# Altium PCB PCB.PcbDoc
Units mm, origin at the board's own origin, x right, y up, seen from the top; angles counter-clockwise.
Board outline 50.79 x 55.31 mm, 2 copper layers (Top Layer, Bottom Layer); 67 components, 81 nets, 442 pads, 0 vias.
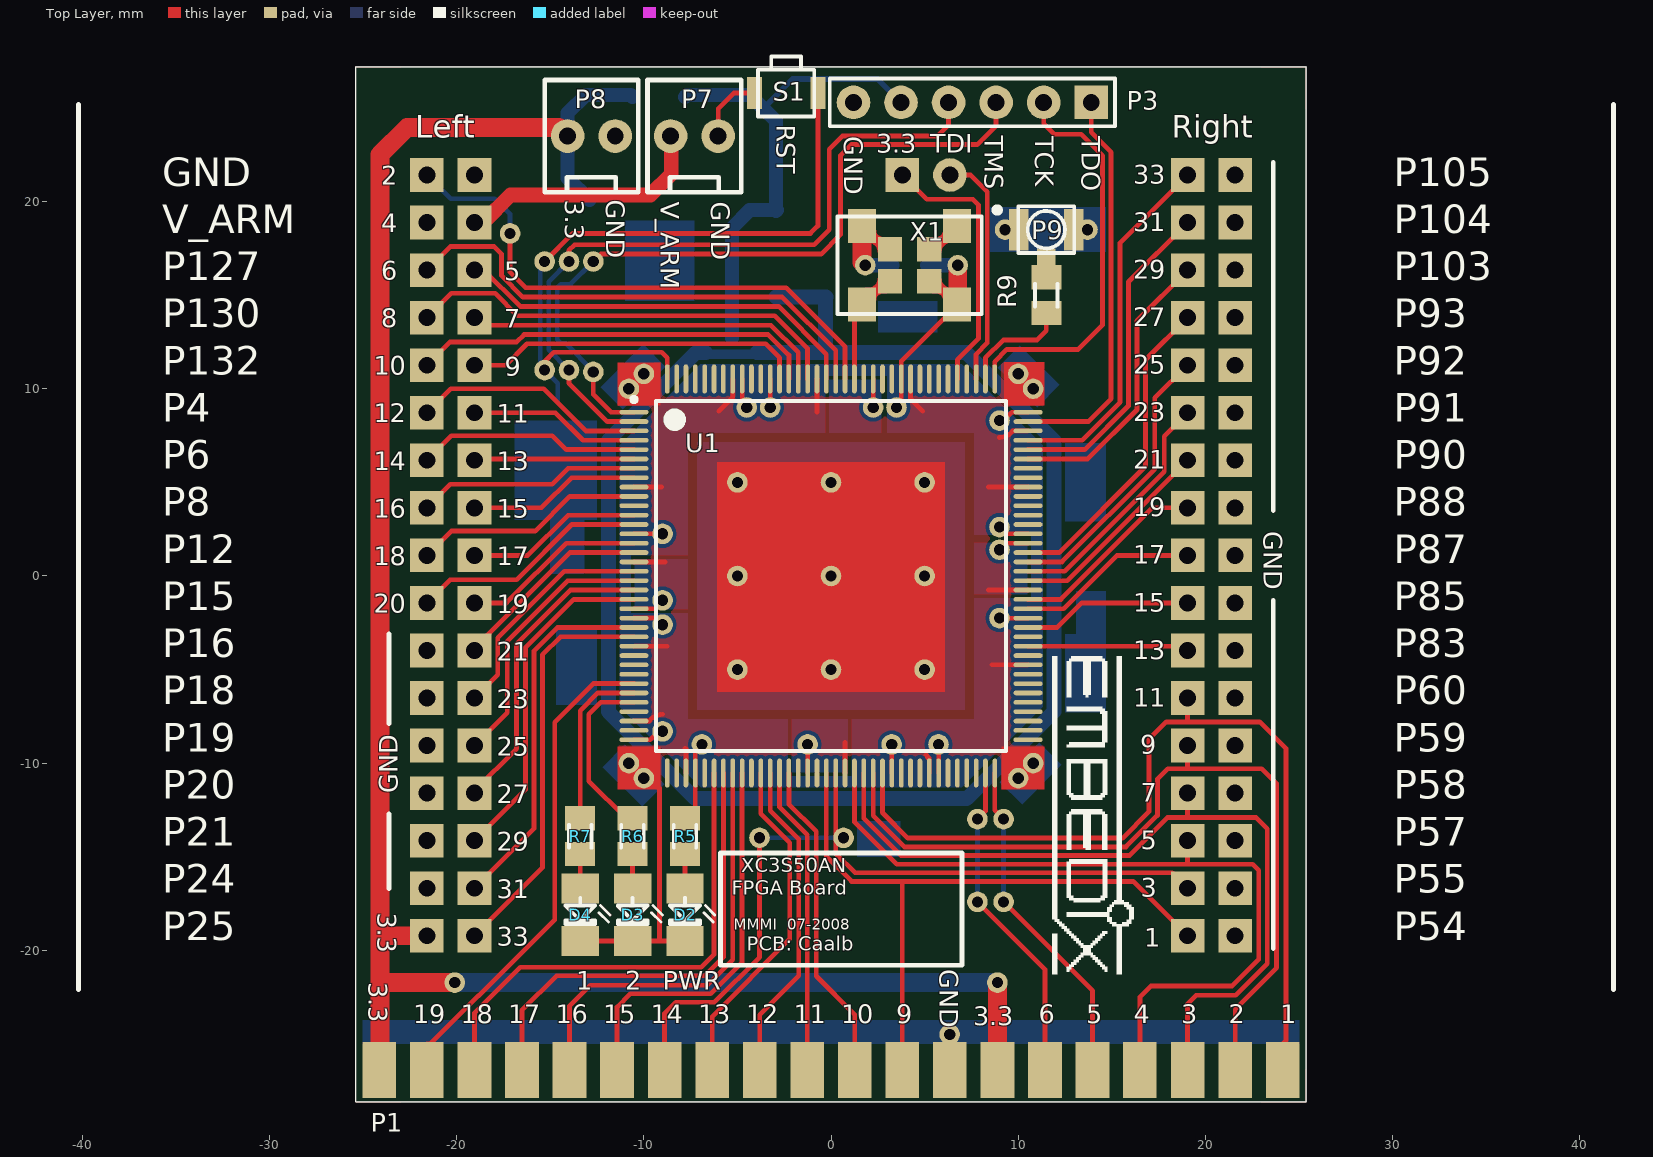
[diagram p0: Top Layer view]
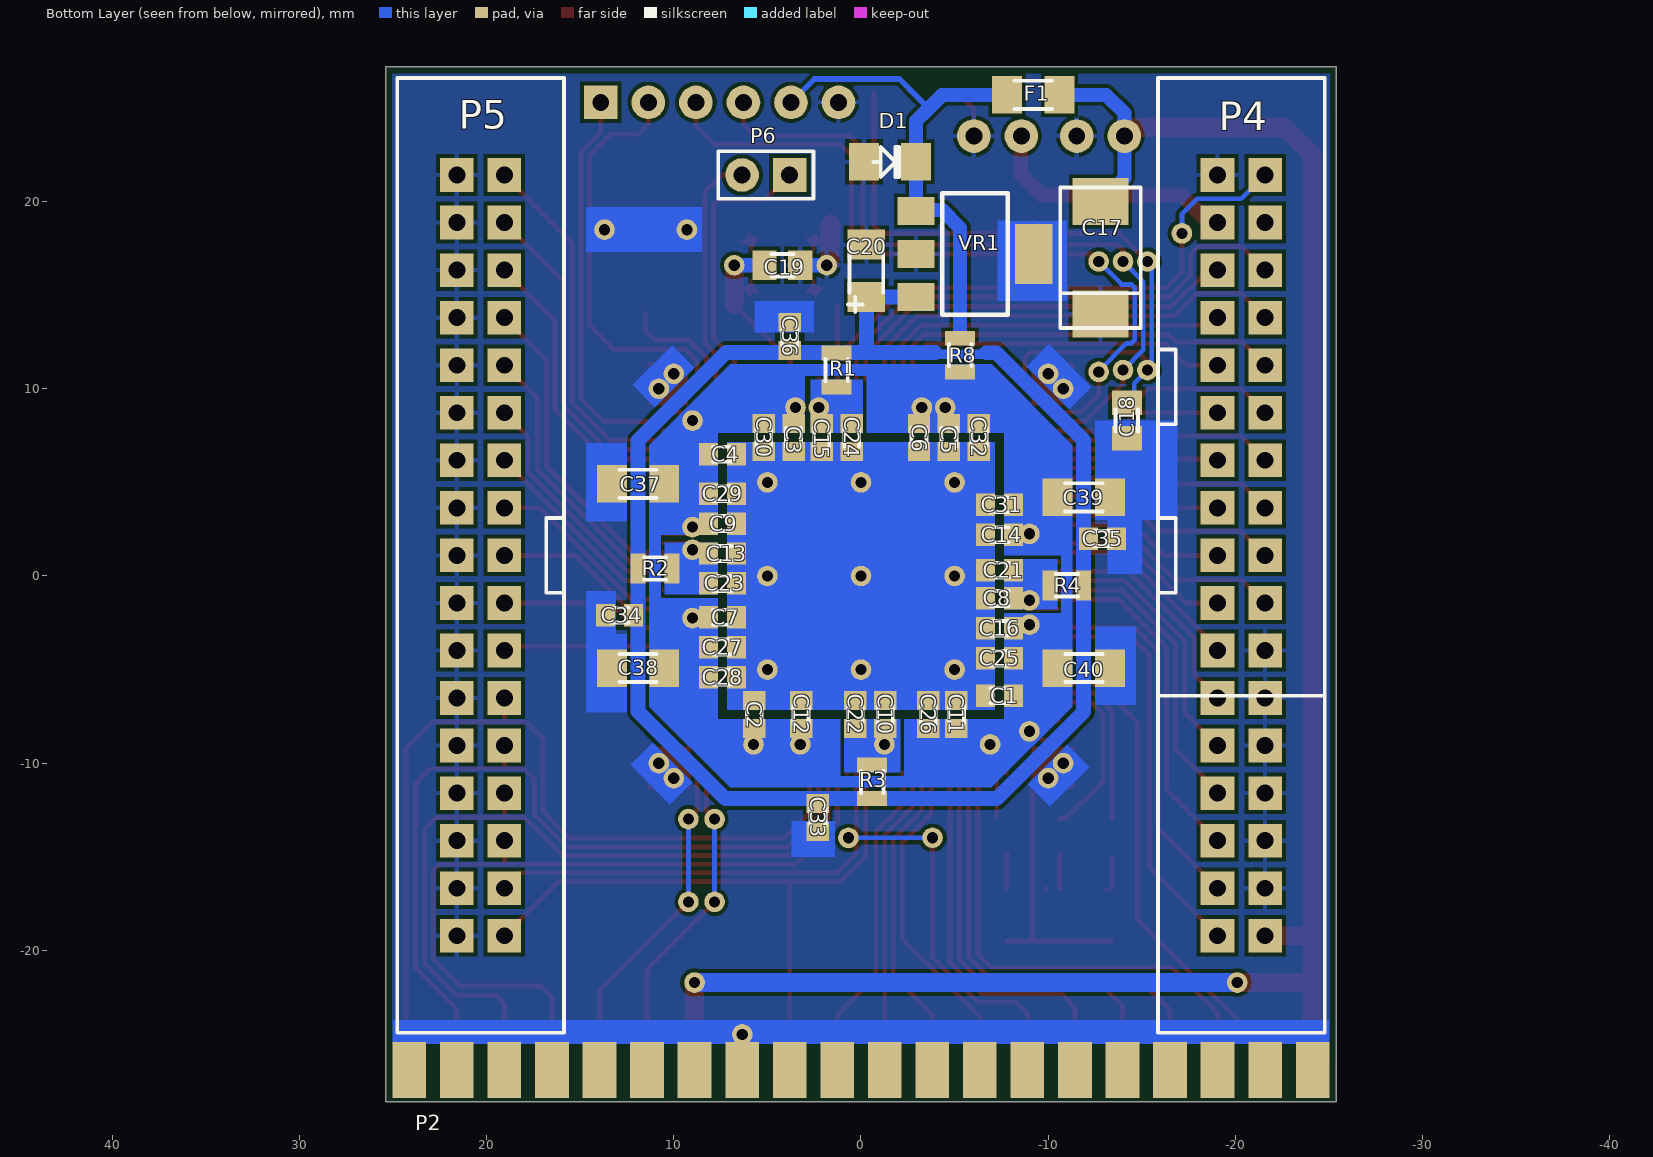
[diagram p1: Bottom Layer view, seen from below]

## Layer stack, top to bottom
Top Layer: signal copper 0.0356
Dielectric: dielectric 0.32, FR-4, Dk 4.8
Bottom Layer: signal copper 0.0356

## Board outline
25.39,-28.09 25.39,27.213 25.383,27.213 -25.4,27.213 -25.4,-28.1

## Design rules (kind name [scope] priority, off if disabled: settings)
Clearance [All] p1: gap=0.2
PolygonConnect [All] p1: connectstyle=Relief reliefconductorwidth=0.254 reliefentries=4 polygonreliefangle="90 Angle"
RoomDefinition "IO connections" [InComponentClass('IO connections')] p1: confinementstyle=ConfineIn formatcopy=TRUE lockcomponents=FALSE outline 26.55,-25.29 36.48,-25.29 36.48,-18.96 26.55,-18.96
RoomDefinition Power [InComponentClass('Power')] p2: confinementstyle=ConfineIn formatcopy=TRUE lockcomponents=FALSE outline 64.95,-60.15 82.65,-60.15 82.65,-54.7 64.95,-54.7
RoutingVias [All] p1: holewidth=0.711 width=1.27 viastyle="Through Hole" minholewidth=0.711 minwidth=1.27 maxholewidth=0.711 maxwidth=1.27
SolderMaskExpansion [All] p1: expansion=0.102
TestPointUsage [All] p1: valid=0 allowmultiple=FALSE
Testpoint [All] p1: side=15 testpointundercomponent=TRUE minsize=1.016 maxsize=2.54 preferedsize=1.524 minholesize=0 maxholesize=1.016 preferedholesize=0.813 testpointgrid=0.025 style=1023 order=0-112345678
Width [All] p1: maxlimit=1.8 minlimit=0.254 preferedwidth=0.254
19 further rules are at their usual default settings.

## Classes and differential pairs
component class Power: C1 C2 C3 C4 C5 C6 C7 C8 C9 C10 C11 C12 C13 C14 C15 C16 C17 C20 C21 C22 C23 C24 C25 C26 C27 C28 C29 C30 C31 C32 C33 C34 C35 C36 C37 C38 C39 C40 D1 F1 P7 P8 R1 R2 R3 R4 R8 VR1
component class "IO connections": C18 C19 D2 D3 D4 P1 P2 P3 P4 P5 P6 P9 R5 R6 R7 R9 S1 U1 X1

## Components (designator, comment, footprint, x,y, rotation, side; value= is the part's Value field where it differs from the comment)
C1 "Cap" 0603 -7.4,-6.4 r0 bottom locked
C2 "Cap" 0603 5.7,-7.4 r90 bottom locked
C3 "Cap" 0603 3.6,7.4 r90 bottom locked
C4 "Cap" 0603 7.4,6.5 r180 bottom locked
C5 "Cap" 0603 -4.7,7.4 r90 bottom locked
C6 "Cap" 0603 -3.1,7.4 r270 bottom locked
C7 "Cap" 0603 7.4,-2.2 r0 bottom locked
C8 "Cap" 0603 -7.4,-1.2 r0 bottom locked
C9 "Cap" 0603 7.4,2.8 r0 bottom locked
C10 "Cap" 0603 -1.3,-7.4 r90 bottom locked
C11 "Cap" 0603 -5.1,-7.4 r270 bottom
C12 "Cap" 0603 3.2,-7.4 r270 bottom locked
C13 "Cap" 0603 7.4,1.2 r180 bottom locked
C14 "Cap" 0603 -7.4,2.2 r180 bottom locked
C15 "Cap" 0603 2.1,7.4 r270 bottom locked
C16 "Cap" 0603 -7.4,-2.8 r180 bottom locked
C17 "Cap Pol1" "TANTAL 100UF 10V (LAGER)" -12.8,17 r270 bottom
C18 "Cap" 0805 -14.2,8.3 r90 bottom
C19 "Cap" 0805 4.2,16.6 r0 bottom
C20 "Cap Pol1" 1206POL -0.29,16.3 r90 bottom
C21 "Cap" 0603 -7.4,0.3 r0 bottom locked
C22 "Cap" 0603 0.3,-7.4 r90 bottom locked
C23 "Cap" 0603 7.4,-0.4 r180 bottom locked
C24 "Cap" 0603 0.5,7.4 r270 bottom locked
C25 "Cap" 0603 -7.4,-4.4 r180 bottom locked
C26 "Cap" 0603 -3.6,-7.4 r270 bottom
C27 "Cap" 0603 7.4,-3.8 r0 bottom locked
C28 "Cap" 0603 7.4,-5.4 r0 bottom locked
C29 "Cap" 0603 7.4,4.4 r0 bottom locked
C30 "Cap" 0603 5.2,7.4 r90 bottom locked
C31 "Cap" 0603 -7.4,3.8 r180 bottom locked
C32 "Cap" 0603 -6.3,7.4 r90 bottom locked
C33 "Cap" 0603 2.3,-12.9 r90 bottom
C34 "Cap" 0603 12.9,-2.1 r180 bottom
C35 "Cap" 0603 -12.9,2 r0 bottom
C36 "Cap" 0603 3.8,12.8 r270 bottom
C37 "Cap" 1206 11.91,4.92 r180 bottom
C38 "Cap" 1206 11.91,-4.92 r180 bottom
C39 "Cap" 1206 -11.9,4.2 r0 bottom
C40 "Cap" 1206 -11.91,-4.92 r0 bottom
D1 "3V6" D1206 -1.55,22.12 r180 bottom
D2 "POWER" LED1206 -7.8,-18.1 r270 top
D3 "LED2" LED1206 -10.6,-18.1 r270 top
D4 "LED1" LED1206 -13.4,-18.1 r270 top
F1 "315mA" 1206 -9.2,25.7 r0 bottom
P1 "Header 20" "HDR1X20 KANT SPECIAL" 0,-26.4 r180 top
P2 "Header 20" "HDR1X20 KANT" 0,-26.4 r0 bottom
P3 "Header 6" HDR1X6 13.9,25.3 r180 top
P4 "Header 17X2" "HDR2X10/17FLAD Combi" -19.05,21.42 r270 bottom
P5 "Header 17X2" "HDR2X17FLAD Special" 19.05,21.42 r90 bottom
P6 "Header 2" HDR1X2 3.81,21.42 r0 bottom
P7 "Header 2" "HDR2X1 M LÅS" -7.3,23.5 r180 top
P8 "Header 2" "HDR2X1 M LÅS" -12.8,23.5 r180 top
P9 "BNC" "MINIATURE COAXIAL CONNECTORS" 11.5,18.5 r180 top
R1 "Res2" J0805 1.3,11 r270 bottom locked
R2 "Res2" J0805 11,0.4 r180 bottom locked
R3 "Res2" J0805 -0.6,-11 r90 bottom locked
R4 "Res2" J0805 -11,-0.5 r0 bottom locked
R5 "Res2" 0805 -7.8,-13.9 r90 top
R6 "Res2" 0805 -10.6,-13.9 r90 top
R7 "Res2" 0805 -13.4,-13.9 r90 top
R8 "Res2" J0805 -5.3,11.8 r90 bottom
R9 "Res2" 0805 11.5,15 r90 top
S1 "RESET" B3U-3000P -2.4,25.8 r0 top
U1 "XC3S50AN-5TQ144C" TQ144_L 0,0 r0 top locked
VR1 "NCP566" SOT-223 -6.09,17.2 r270 bottom
X1 "CTX283LVCT el. CFPS-39" CB3LV-3C/CFPS-39 4.2,16.6 r180 top

## Footprints (in the part's own frame and the unit in brackets; to place one, negate y for a bottom-side part, rotate by r counter-clockwise, add the part's x,y. Pads: shape width x height; smd on the part's side, far side on the other; paste and mask are expansions set on the pad)
0603 [mm]
  rect 1x1.2 smd: 1(-0.75,0) 2(0.75,0)
  silkscreen extent -0.5,-0.4 0.5,0.4, body extent -0.75,-0.4 0.75,0.4, height 0.4
0805 [mm] "Resistor - MELF-R2012-0805"
  rect 1.3x1.6 smd: 1(-0.95,0) 2(0.95,0)
  silkscreen extent -0.6,-0.6 0.6,0.6, body extent -1,-0.6 1,0.6, height 0.5
1206 [mm] "Resistor - MELF-R3216-1206"
  rect 1.6x2 smd: 1(-1.4,0) 2(1.4,0)
  silkscreen extent -1,-0.75 1,0.75, body extent -1.5,-0.75 1.5,0.75, height 0.5
1206POL [mm]
  rect 1.6x2 smd: 1(-1.4,0) 2(1.4,0)
  silkscreen extent -2.2,-0.9 1.2,1, body extent -1.7,-0.9 1.7,0.9, height 1.85
B3U-3000P [mm] "Micro kant switch Farnell varenummer: 1333655"
  rect 0.8x1.7 smd: 1(-1.7,0) 2(1.7,0)
  silkscreen extent -1.5,-1.25 1.5,1.95, body extent -2,-1.25 2,1.95, height 1.2
CB3LV-3C/CFPS-39 [mm]
  rect 1.5x1.8 smd: 1(-2.54,-2.1) 2(2.54,-2.1) 3(2.54,2.1) 4(-2.54,2.1)
  rect 1.3x1.3 smd: 1(-1.05,-0.85) 2(1.05,-0.85) 3(1.05,0.85) 4(-1.05,0.85)
  silkscreen extent -4.81,-3.08 3.85,2.6, body extent -3.5,-2.5 3.5,2.5, height 1.4
D1206 [mm] "MELF-R3216-1206 modificeret med diode symbol"
  rect 1.6x2 smd: 1(-1.4,0) 2(1.4,0)
  silkscreen extent -0.9,-0.8 0.5,0.8, body extent -1.7,-0.8 1.8,0.8, height 1.6
HDR1X2 [mm]
  rect 1.8x1.8 hole 0.9: 1(0,0)
  round 1.8 hole 0.9: 2(2.54,0)
  silkscreen extent -1.27,-1.27 3.81,1.27, body extent -1.27,-1.27 3.81,1.27, height 9.5
HDR1X6 [mm]
  rect 1.8x1.8 hole 0.9: 1(0,0)
  round 1.8 hole 0.9: 2(2.54,0) 3(5.08,0) 4(7.62,0) 5(10.16,0) 6(12.7,0)
  silkscreen extent -1.27,-1.27 13.97,1.27, body extent -1.27,-1.27 13.97,1.27, height 9.5
"HDR1X20 KANT" [mm]
  rect 1.8x3 smd: 1(-24.13,0) 2(-21.59,0) 3(-19.05,0) 4(-16.51,0) 5(-13.97,0) 6(-11.43,0) 7(-8.89,0) 8(-6.35,0) 9(-3.81,0) 10(-1.27,0) 11(1.27,0) 12(3.81,0) 13(6.35,0) 14(8.89,0) 15(11.43,0) 16(13.97,0) 17(16.51,0) 18(19.05,0) 19(21.59,0) 20(24.13,0)
  body extent -25.4,-1 25.4,10.5, height 2.5
"HDR1X20 KANT SPECIAL" [mm]
  rect 1.8x3 smd: 1(-24.13,0) 2(-21.59,0) 3(-19.05,0) 4(-16.5,0) 5(-13.97,0) 6(-11.43,0) 7(-8.89,0) 8(-6.35,0) 9(-3.81,0) 10(-1.27,0) 11(1.27,0) 12(3.81,0) 13(6.35,0) 14(8.89,0) 15(11.43,0) 16(13.97,0) 17(16.51,0) 18(19.05,0) 19(21.59,0) 20(24.13,0)
  body extent -25.4,-1 25.4,10.5, height 2.5
"HDR2X1 M LÅS" [mm]
  round 1.8 hole 0.9: 1(1.27,0) 2(-1.27,0)
  silkscreen extent -2.5,-3 2.5,3, body extent -2.5,-3 2.5,3, height 11.5
"HDR2X10/17FLAD Combi" [mm]
  rect 1.8x1.8 hole 0.9: 1(0,0) 2(0,2.54) 3(2.54,0) 4(2.54,2.54) 5(5.08,0) 6(5.08,2.54) 7(7.62,0) 8(7.62,2.54) 9(10.16,0) 10(10.16,2.54) 11(12.7,0) 12(12.7,2.54) 13(15.24,0) 14(15.24,2.54) 15(17.78,0) 16(17.78,2.54) 17(20.32,0) 18(20.32,2.54) 19(22.86,0) 20(22.86,2.54) 21(25.4,0) 22(25.4,2.54) 23(27.94,0) 24(27.94,2.54) 25(30.48,0) 26(30.48,2.54) 27(33.02,0) 28(33.02,2.54) 29(35.56,0) 30(35.56,2.54) 31(38.1,0) 32(38.1,2.54) 33(40.64,0) 34(40.64,2.54)
  silkscreen extent -5.18,-3.18 45.82,5.72, body extent -5.28,-3.18 45.82,5.72, height 10
"HDR2X17FLAD Special" [mm]
  rect 1.8x1.8 hole 0.9: 1(-40.64,0) 2(-40.64,2.54) 3(-38.1,0) 4(-38.1,2.54) 5(-35.56,0) 6(-35.56,2.54) 7(-33.02,0) 8(-33.02,2.54) 9(-30.48,0) 10(-30.48,2.54) 11(-27.94,0) 12(-27.94,2.54) 13(-25.4,0) 14(-25.4,2.54) 15(-22.86,0) 16(-22.86,2.54) 17(-20.32,0) 18(-20.32,2.54) 19(-17.78,0) 20(-17.78,2.54) 21(-15.24,0) 22(-15.24,2.54) 23(-12.7,0) 24(-12.7,2.54) 25(-10.16,0) 26(-10.16,2.54) 27(-7.62,0) 28(-7.62,2.54) 29(-5.08,0) 30(-5.08,2.54) 31(-2.54,0) 32(-2.54,2.54) 33(0,0) 34(0,2.54)
  silkscreen extent -45.82,-3.18 5.18,5.72, body extent -45.92,-3.18 5.18,5.72, height 10
J0805 [mm] "0805 med mere plads mellem pads"
  rect 0.8x1.6 smd: 1(-0.9,0) 2(0.9,0)
  silkscreen extent -0.6,-0.6 0.6,0.6, body extent -1,-0.6 1,0.6, height 0.5
LED1206 [mm] "MELF-R3216-1206 modificeret med diode symbol"
  rect 1.6x2 smd: 1(-1.4,0) 2(1.4,0)
  silkscreen extent -0.9,-0.8 0.5,1.59, body extent -1.6,-0.8 1.6,0.8, height 1.1
"MINIATURE COAXIAL CONNECTORS" [mm] "Meets up to 6 GHz Requirement"
  rect 1x1 smd: 1(0,1.5)
  rect 1.05x2.2 smd: 2(-1.475,0) 2(1.475,0)
  silkscreen extent -1.5,-1.25 1.5,1.25, body extent -1.5,-1.25 1.5,1.25, height 1.3
SOT-223 [mm]
  rect 1.5x2 smd: 1(-2.3,-3.15) 2(0,-3.15) 3(2.3,-3.15)
  rect 3.2x2 smd: 2(0,3.15)
  silkscreen extent -3.25,-1.75 3.25,1.75, body extent -3.25,-3.55 3.25,3.6, height 1.7
"TANTAL 100UF 10V (LAGER)" [mm]
  rect 2.5x3 smd: 1(-3,0) 2(3,0)
  silkscreen extent -3.75,-2.15 3.75,2.15, body extent -3.75,-2.15 3.75,2.15, height 3
TQ144_L [mm] "Thin QFP, 144-Leads, Body 20x20mm, Pitch 0.5mm, IPC High Density"
  oval 1.55x0.25 smd: 1(-10.525,8.75) 2(-10.525,8.25) 3(-10.525,7.75) 4(-10.525,7.25) 5(-10.525,6.75) 6(-10.525,6.25) 7(-10.525,5.75) 8(-10.525,5.25) 9(-10.525,4.75) 10(-10.525,4.25) 11(-10.525,3.75) 12(-10.525,3.25) 13(-10.525,2.75) 14(-10.525,2.25) 15(-10.525,1.75) 16(-10.525,1.25) 17(-10.525,0.75) 18(-10.525,0.25) 19(-10.525,-0.25) 20(-10.525,-0.75) 21(-10.525,-1.25) 22(-10.525,-1.75) 23(-10.525,-2.25) 24(-10.525,-2.75) 25(-10.525,-3.25) 26(-10.525,-3.75) 27(-10.525,-4.25) 28(-10.525,-4.75) 29(-10.525,-5.25) 30(-10.525,-5.75) 31(-10.525,-6.25) 32(-10.525,-6.75) 33(-10.525,-7.25) 34(-10.525,-7.75) 35(-10.525,-8.25) 36(-10.525,-8.75) 73(10.525,-8.75) 74(10.525,-8.25) 75(10.525,-7.75) 76(10.525,-7.25) 77(10.525,-6.75) 78(10.525,-6.25) 79(10.525,-5.75) 80(10.525,-5.25) 81(10.525,-4.75) 82(10.525,-4.25) 83(10.525,-3.75) 84(10.525,-3.25) 85(10.525,-2.75) 86(10.525,-2.25) 87(10.525,-1.75) 88(10.525,-1.25) 89(10.525,-0.75) 90(10.525,-0.25) 91(10.525,0.25) 92(10.525,0.75) 93(10.525,1.25) 94(10.525,1.75) 95(10.525,2.25) 96(10.525,2.75) 97(10.525,3.25) 98(10.525,3.75) 99(10.525,4.25) 100(10.525,4.75) 101(10.525,5.25) 102(10.525,5.75) 103(10.525,6.25) 104(10.525,6.75) 105(10.525,7.25) 106(10.525,7.75) 107(10.525,8.25) 108(10.525,8.75)
  oval 0.25x1.55 smd: 37(-8.75,-10.525) 38(-8.25,-10.525) 39(-7.75,-10.525) 40(-7.25,-10.525) 41(-6.75,-10.525) 42(-6.25,-10.525) 43(-5.75,-10.525) 44(-5.25,-10.525) 45(-4.75,-10.525) 46(-4.25,-10.525) 47(-3.75,-10.525) 48(-3.25,-10.525) 49(-2.75,-10.525) 50(-2.25,-10.525) 51(-1.75,-10.525) 52(-1.25,-10.525) 53(-0.75,-10.525) 54(-0.25,-10.525) 55(0.25,-10.525) 56(0.75,-10.525) 57(1.25,-10.525) 58(1.75,-10.525) 59(2.25,-10.525) 60(2.75,-10.525) 61(3.25,-10.525) 62(3.75,-10.525) 63(4.25,-10.525) 64(4.75,-10.525) 65(5.25,-10.525) 66(5.75,-10.525) 67(6.25,-10.525) 68(6.75,-10.525) 69(7.25,-10.525) 70(7.75,-10.525) 71(8.25,-10.525) 72(8.75,-10.525) 109(8.75,10.525) 110(8.25,10.525) 111(7.75,10.525) 112(7.25,10.525) 113(6.75,10.525) 114(6.25,10.525) 115(5.75,10.525) 116(5.25,10.525) 117(4.75,10.525) 118(4.25,10.525) 119(3.75,10.525) 120(3.25,10.525) 121(2.75,10.525) 122(2.25,10.525) 123(1.75,10.525) 124(1.25,10.525) 125(0.75,10.525) 126(0.25,10.525) 127(-0.25,10.525) 128(-0.75,10.525) 129(-1.25,10.525) 130(-1.75,10.525) 131(-2.25,10.525) 132(-2.75,10.525) 133(-3.25,10.525) 134(-3.75,10.525) 135(-4.25,10.525) 136(-4.75,10.525) 137(-5.25,10.525) 138(-5.75,10.525) 139(-6.25,10.525) 140(-6.75,10.525) 141(-7.25,10.525) 142(-7.75,10.525) 143(-8.25,10.525) 144(-8.75,10.525)
  silkscreen extent -10.65,-9.35 9.35,9.55, body extent -10,-10 10,10, height 1.6

## Part data
C1 C2 C3 C4 C5 C6 C7 C8 C9 C10 C11 C12 C13 C14 C15 C16 C18 C19 C21 C22 C23 C24 C25 C26 C27 C28 C29 C30 C31 C32 C33 C34 C35 C36 C37 C38 C39 C40: "Capacitor"
C17 C20: "Polarized Capacitor (Radial)"
D1: library part "Diode 1N5407", "Small signal diode"
D2 D3 D4: library part LED0, "Typical INFRARED GaAs LED"
F1: library part "Fuse 2", "Fuse"
P1 P2: "Header, 20-Pin"
P3: "Header, 6-Pin"
P4 P5: "Header, 17-Pin, Dual row"
P6: library part "Header 2X2", "Header, 2-Pin, Dual row"
P7 P8: "Header, 2-Pin"
P9: "BNC Elbow Connector"
R1 R2 R3 R4 R5 R6 R7 R8 R9: "Resistor"
S1: library part SW-PB, "Switch"
U1: "Spartan-3AN Non-Volatile FPGA, 108 User I/Os, 144-Pin TQFP, High Performance, Commercial Grade"
VR1: library part "Volt Reg", "Voltage Regulator"
X1: library part CFPS-39, "3.3V, ultra minature surface mount oscillator"

## Free pads (board coordinates)
  round 1.1 hole 0.6: 0(-20.1,-21.72) 0(-17.146,18.3) 0(-15.3,11) 0(-15.3,16.8) 0(-14,11) 0(-14,16.8) 0(-12.7,10.9) 0(-12.7,16.8) 0(-10.8,-10) 0(-10.8,10) 0(-10,-10.8) 0(-10,10.8) 0(-9,-8.3) 0(-9,-2.6) 0(-9,-1.3) 0(-9,2.25) 0(-6.9,-9) 0(-5,-5) 0(-5,0) 0(-5,5) 0(-4.5,9) 0(-3.82,-13.987) 0(-3.25,9) 0(-1.25,-9) 0(0,-5) 0(0,0) 0(0,5) 0(0.67,-13.99) 0(1.827,16.605) 0(2.25,9) 0(3.24,-9) 0(3.5,9) 0(5,-5) 0(5,0) 0(5,5) 0(5.74,-9) 0(6.34,-24.49) 0(6.77,16.6) 0(7.82,-17.41) 0(7.82,-12.99) 0(8.89,-21.72) 0(9,-2.25) 0(9,1.4) 0(9,2.61) 0(9,8.3) 0(9.22,-17.41) 0(9.22,-12.99) 0(9.3,18.5) 0(10,-10.8) 0(10,10.8) 0(10.8,-10) 0(10.8,10) 0(13.7,18.5)

## Nets (pads, with @x,y where several pads share a name; then routed paths per layer and width w, separated by ;. In a path a pad name is that pad's centre, name@x,y a point inside that pad or via, vN(x,y) a via of type N, cw(c..) or ccw(c..) an arc to the next point about the centre after c; other vN are vias at no path point)
1.2V: C20.1 C33.2 C34.2 C35.2 C36.2 R1.1 R2.1 R3.1 R4.1 VR1.3 | length 87
  Bottom Layer w0.8: -6.7,11.925 -7.225,11.925 -11.9,7.25 -11.9,-7.25 -7.25,-11.9 7.25,-11.9 11.9,-7.25 11.9,7.25 7.2,11.95 -3.95,11.95 ; VR1.3@-2.93,14.9 C20.1@-0.28,14.9 ; -0.29,12.14 C20.1
3.3V: C1.1 C2.1 C3.2 C4.1 C5.2 C6.1 C7.2 C9.2 C11.2 C12.2 C14.2 C16.2 C19.2 C25.2 C26.2 C27.2 C28.2 C29.2 C30.2 C31.2 C32.2 C37.2 C38.2 C39.2 C40.2 pad.0@3.5,9 pad.0@3.24,-9 pad.0@5.74,-9 pad.0@6.77,16.6 pad.0@9,2.61 pad.0@9,8.3 pad.0@9,-2.25 pad.0@-3.25,9 pad.0@-4.5,9 pad.0@-6.9,-9 pad.0@-9,2.25 pad.0@-9,-2.6 pad.0@-9,-8.3 R5.2 R8.1 U1.14 U1.23 U1.36 U1.40 U1.61 U1.66 U1.86 U1.95 U1.108 U1.119 U1.133 U1.136 X1.4 | length 30.1
  Top Layer w0.25: U1.36 -9.65,-8.75 pad.0@-9.3,-8.4 ; U1.14 pad.0@-9,2.25 ; U1.40 -7.25,-9.35 pad.0@-6.9,-9 ; U1.136 -4.75,9.25 pad.0@-4.5,9 ; pad.0@-3.25,9 U1.133 ; U1.61 pad.0@3.25,-9.01 ; pad.0@3.75,9 U1.119 ; U1.66 pad.0@5.75,-9.01 ; pad.0@9,-2.25 U1.86 ; pad.0@9,2.61 9.36,2.25 U1.95 ; pad.0@9.2,8.3 9.65,8.75 U1.108
  Top Layer w0.254: U1.23 -9.35,-2.25 pad.0@-9,-2.6 ; R5.2@-7.25,-12.85 U1.40 ; U1.119 3.75,11.48 X1.4@6.77,14.5 ; pad.0@9,8.3 pad.0@9.2,8.3
  Top Layer w1: X1.4@6.77,14.5 pad.0@6.77,16.6
  Bottom Layer w0.8: C19.2 pad.0@6.77,16.6
GND: C1.2 C2.2 C3.1 C4.2 C5.1 C6.2 C7.1 C8.2 C9.1 C10.2 C11.1 C12.1 C13.2 C14.1 C15.2 C16.1 C17.2 C18.1 C19.1 C20.2 C21.2 C22.2 C23.2 C24.2 C25.1 C26.1 C27.1 C28.1 C29.1 C30.1 C31.1 C32.1 C33.1 C34.1 C35.1 C36.1 C37.1 C38.1 C39.1 C40.1 D1.1 D2.2 D3.2 D4.2 P1.8 P2.1 P2.2 P2.3 P2.4 P2.5 P2.6 P2.7 P2.8 P2.9 P2.10 P2.11 P2.12 P2.13 P2.14 P2.15 P2.16 P2.17 P2.18 P2.19 P2.20 P3.6 P4.1 P4.22 P4.24 P4.26 P4.28 P4.30 P4.32 P5.2 P5.4 P5.6 P5.8 P5.10 P5.12 P5.14 P5.16 P5.18 P5.20 P5.22 P5.24 P5.26 P5.28 P5.30 P5.32 P5.34 P7.2 P8.2 P9.2 pad.0@0,0 pad.0@0,5 pad.0@0,-5 pad.0@1.827,16.605 pad.0@5,0 pad.0@5,5 pad.0@5,-5 pad.0@6.34,-24.49 pad.0@9.3,18.5 pad.0@10,10.8 pad.0@10,-10.8 pad.0@10.8,10 pad.0@10.8,-10 pad.0@13.7,18.5 pad.0@-5,0 pad.0@-5,5 pad.0@-5,-5 pad.0@-10,10.8 pad.0@-10,-10.8 pad.0@-10.8,10 pad.0@-10.8,-10 S1.1 U1.9 U1.17 U1.26 U1.34 U1.39 U1.56 U1.65 U1.81 U1.89 U1.100 U1.106 U1.118 U1.128 U1.137 VR1.2 X1.2 | length 45.6
  Top Layer w0.25: U1.34 -9.712,-7.75 ; U1.26 -8.75,-3.75 ; U1.17 -8.85,0.75 ; U1.9 -9.05,4.75 ; -9.712,-7.741 cw(c-9,-8.3) -9,-7.394 ; U1.39 -7.75,-9.25 ; -0.75,8.75 U1.128 ; U1.56 0.75,-8.9 ; 4.25,9.455 U1.118 ; 8.4,-0.75 U1.89 ; 8.4,4.75 U1.100 ; 8.6,-4.75 U1.81 ; 9,7.4 ccw(c9,8.306) 9.712,7.746 ; 9.7,7.75 U1.106
  Top Layer w0.254: D4.2 D2.2 ; -9.17,-19.5 -9.17,-11.342 ; -7.8,-9.2 -7.75,-9.25 ; P7.2 -6.03,24.97 -5.2,25.8 S1.1 ; -6,8.8 -5.25,9.55 U1.137 ; 4.25,9.455 4.9,8.805 ; 5.08,-9.566 ccw(c5.087,-9.558) 5.087,-9.569 5.118,-9.569 ; 5.133,-9.633 5.143,-9.643 cw(c5.078,-9.708) 5.17,-9.708 ccw(c5.217,-9.662) 5.217,-9.727 5.25,-9.727 U1.65
  Top Layer w1: X1.2@1.6,18.5 X1.2@1.6,18.8 ; X1.2@1.66,18.7 1.66,16.767 pad.0@1.827,16.6
  Bottom Layer w0.8: pad.0@1.827,16.6 C19.1
"IN 3.3V": C17.1 F1.1 P1.7 P1.20 P4.34 P8.1 pad.0@8.89,-21.72 pad.0@-20.1,-21.72 | length 106.3
  Top Layer w0.254: P1.20@-24.1,-24.97 -24.1,-24.9
  Top Layer w1: P1.20@-24.1,-24.97 -24.1,22.5 -22.64,23.96 -14.53,23.96 P8.1 ; -24.1,-21.73 -24.09,-21.72 pad.0@-20.1,-21.72 ; -24.1,-19 -23.88,-19.22 P4.34 ; P1.7@8.89,-25 pad.0@8.89,-21.72
  Bottom Layer w0.75: C17.1@-12.9,20.1 -14.07,21.27 P8.1 -14.07,24.73 -13.1,25.7 -10.7,25.7 F1.1@-10.6,25.6
  Bottom Layer w1: pad.0@-20.1,-21.72 pad.0@8.89,-21.72
M0: U1.38
M1: U1.37
NetC8_1: C8.1 C21.1 pad.0@-9,-1.3 R4.2 U1.22 | length 1.7
  Top Layer w0.25: U1.22 -9.35,-1.75 pad.0@-9,-1.4
NetC10_1: C10.1 C22.1 pad.0@-1.25,-9 R3.2 U1.52 | length 1.5
  Top Layer w0.25: U1.52 pad.0@-1.25,-9
NetC13_1: C13.1 C23.1 pad.0@9,1.4 R2.2 U1.94 | length 1.7
  Top Layer w0.254: pad.0@9,1.4 9.35,1.75 U1.94
NetC15_1: C15.1 C24.1 pad.0@2.25,9 R1.2 U1.122 | length 1.5
  Top Layer w0.25: pad.0@2.25,9 U1.122
NetC18_2: C18.2 pad.0@-15.3,11 pad.0@-15.3,16.8 S1.2 U1.144 | length 38.9
  Top Layer w0.254: pad.0@-15.3,11 -15.3,11.458 -14.812,11.946 -9.046,11.946 -8.75,11.65 U1.144 ; pad.0@-15.3,16.8 -13.8,18.3 -1.1,18.3 -0.7,18.7 S1.2
  Bottom Layer w0.254: pad.0@-15.3,16.8 -15.535,16.565 -15.535,11.235 -15.3,11 -14.6,10.3 C18.2@-14.6,9.35
NetD2_1: D2.1 R5.1 | length 1.9
  Top Layer w0.254: D2.1 R5.1
NetD3_1: D3.1 R6.1 | length 1.9
  Top Layer w0.254: D3.1 R6.1 ; D3.1@-9.9,-16.7 D3.1@-9.838,-16.762
NetD4_1: D4.1 R7.1 | length 1.7
  Top Layer w0.254: D4.1 R7.1@-13.4,-15
NetP9_1: P9.1 R9.2
P3: P4.12 U1.3 | length 12.5
  Top Layer w0.254: P4.12 -20.31,10 -15.358,10 -13.108,7.75 U1.3
P4: P4.11 U1.4 | length 9.1
  Top Layer w0.254: P4.11 -14.72,8.72 -13.25,7.25 U1.4
P5: P4.14 U1.5 | length 11.9
  Top Layer w0.254: P4.14 -20.28,7.49 -14.89,7.49 -14.15,6.75 U1.5
P6: P4.13 U1.6 | length 8.5
  Top Layer w0.254: P4.13@-19.05,6.25 U1.6
P7: P4.16 U1.7 | length 11.9
  Top Layer w0.254: P4.16 -20.33,4.9 -14.9,4.9 -14.05,5.75 U1.7
P8: P4.15 U1.8 | length 9.2
  Top Layer w0.254: P4.15 -15.473,3.64 -13.863,5.25 U1.8
P10: P4.18 U1.10 | length 12.4
  Top Layer w0.254: P4.18 -20.29,2.4 -15.8,2.4 -13.95,4.25 U1.10
P12: P4.17 U1.12 | length 9.4
  Top Layer w0.254: P4.17 -16.2,1.1 -14.05,3.25 U1.12
P13: P4.20 U1.13 | length 12.8
  Top Layer w0.254: P4.20 -20.35,-0.2 -16.8,-0.2 -13.85,2.75 U1.13
P15: P4.19 U1.15 | length 9.8
  Top Layer w0.254: P4.19 -17.34,-1.44 -14.15,1.75 U1.15
P16: P4.21 U1.16 | length 10.8
  Top Layer w0.254: P4.21 -19.05,-3.85 -13.95,1.25 U1.16
P18: P4.23 U1.18 | length 12.9
  Top Layer w0.254: P4.23@-18.6,-6.52 P4.23 -17.8,-5.27 -17.8,-3.3 -14.25,0.25 U1.18
P19: P4.25 U1.19 | length 14.4
  Top Layer w0.254: P4.25 -17.3,-7.31 -17.3,-3.475 -14.075,-0.25 U1.19
P20: P4.27 U1.20 | length 16.2
  Top Layer w0.254: P4.27@-19.05,-11.468 -16.8,-9.218 -16.8,-3.628 -13.922,-0.75 U1.20
P21: P4.29 U1.21 | length 18.3
  Top Layer w0.254: P4.29 -16.324,-11.414 -16.324,-3.824 -13.75,-1.25 U1.21
P24: P4.31 U1.24 | length 19.9
  Top Layer w0.254: P4.31 -15.87,-13.5 -15.87,-4.012 -14.608,-2.75 U1.24
P25: P4.33 U1.25 | length 21.8
  Top Layer w0.254: P4.33 -15.416,-15.586 -15.416,-4.216 -14.45,-3.25 U1.25
P30: P1.19 U1.30 | length 25.2
  Top Layer w0.254: P1.19@-21.59,-25 -21.4,-25 -18.81,-22.41 -18.799,-22.41 -14.763,-18.373 -14.763,-7.822 -12.69,-5.75 U1.30
P31: R7.2 U1.31 | length 9
  Top Layer w0.254: R7.2 -13.4,-7.2 -12.45,-6.25 U1.31
P32: R6.2 U1.32 | length 9.4
  Top Layer w0.254: R6.2 -10.95,-12.95 -12.946,-10.954 -12.946,-7.388 -12.308,-6.75 U1.32
P42: P1.18 U1.42 | length 25.4
  Top Layer w0.254: P1.18@-19.05,-25 -19.05,-23.35 -16.6,-20.9 -6.932,-20.9 -6.25,-20.218 U1.42
P43: P1.17 U1.43 | length 23.6
  Top Layer w0.254: P1.17@-16.51,-25 -16.51,-23.21 -14.66,-21.36 -6.75,-21.36 -5.75,-20.36 U1.43
P44: P1.16 U1.44 | length 21.7
  Top Layer w0.254: P1.16@-13.97,-25 -13.97,-22.97 -12.86,-21.86 -6.608,-21.86 -5.25,-20.502 U1.44
P45: P1.15 U1.45 | length 19.8
  Top Layer w0.254: P1.15@-11.43,-25 -11.43,-23.03 -10.715,-22.315 -6.421,-22.315 -4.75,-20.644 U1.45
P46: U1.46
P47: P1.13 U1.47 | length 16.8
  Top Layer w0.254: P1.13@-6.35,-25 -6.35,-23.54 -2.2,-19.39 -2.2,-14.25 -3.75,-12.7 U1.47
P48: P1.12 U1.48 | length 15.8
  Top Layer w0.254: -3.81,-24.87 -3.81,-23.44 -1.724,-21.354 -1.724,-14.056 -3.25,-12.53 U1.48
P49: P1.11 U1.49 | length 15.1
  Top Layer w0.254: U1.49 -2.75,-12.35 -1.27,-13.83 P1.11@-1.27,-25
P50: P1.10 U1.50 | length 15.9
  Top Layer w0.254: U1.50 -2.25,-12.19 -0.79,-13.65 -0.79,-21.37 1.27,-23.43 P1.10@1.27,-25
P51: U1.51
P54: P1.9 P5.1 U1.54 | length 34.2
  Top Layer w0.254: U1.54 -0.25,-14.97 1.1,-16.32 16.15,-16.32 P5.1 ; P1.9@3.81,-25 3.81,-16.35
P55: P1.14 P5.3 pad.0@0.67,-13.99 pad.0@-3.82,-13.987 U1.55 | length 42.7
  Top Layer w0.254: P1.14@-8.89,-25 -8.89,-23.37 -8.29,-22.77 -6.229,-22.77 -3.82,-20.361 pad.0@-3.82,-13.987 ; U1.55 0.25,-14.828 1.282,-15.86 18.23,-15.86 P5.3
  Bottom Layer w0.254: pad.0@-3.82,-13.987 pad.0@0.67,-13.99
P57: P1.4 P5.5 U1.57 | length 40.8
  Top Layer w0.254: U1.57 1.25,-13.14 3.51,-15.4 22.53,-15.4 22.845,-15.715 22.845,-20.485 21.43,-21.9 17.1,-21.9 16.51,-22.49 P1.4@16.51,-25 ; 19.05,-15.25 P5.5
P58: P1.3 P5.7 U1.58 | length 41.6
  Top Layer w0.254: U1.58 1.75,-12.953 3.727,-14.93 15.95,-14.93 17.98,-12.9 22.7,-12.9 23.3,-13.5 23.3,-20.709 21.609,-22.4 19.5,-22.4 19.05,-22.85 P1.3@19.05,-25 ; 19.05,-12.85 P5.7
P59: P1.2 P5.9 U1.59 | length 43.8
  Top Layer w0.254: U1.59 2.25,-12.803 3.922,-14.475 15.755,-14.475 17.44,-12.79 17.44,-10.85 17.99,-10.3 23.01,-10.3 23.8,-11.09 23.8,-20.93 21.59,-23.14 P1.2@21.59,-25 ; 19.05,-10.3 P5.9
P60: P1.1 P5.11 U1.60 | length 46.7
  Top Layer w0.254: U1.60 2.75,-12.64 4.11,-14 15.588,-14 16.986,-12.602 16.986,-8.724 17.91,-7.8 22.9,-7.8 24.3,-9.2 24.3,-24.83 P1.1@24.13,-25 ; 19.05,-7.7 P5.11
P71: P1.6 pad.0@7.82,-12.99 pad.0@7.82,-17.41 U1.71 | length 16.1
  Top Layer w0.254: pad.0@7.82,-17.41 11.43,-21.02 P1.6@11.43,-25 ; pad.0@7.82,-12.99 8.25,-12.56 U1.71
  Bottom Layer w0.254: pad.0@7.82,-17.41 pad.0@7.82,-12.99
P72: P1.5 pad.0@9.22,-12.99 pad.0@9.22,-17.41 U1.72 | length 16.6
  Top Layer w0.254: U1.72 8.75,-12.52 pad.0@9.22,-12.99 ; pad.0@9.22,-17.41 13.97,-22.16 P1.5@13.97,-25
  Bottom Layer w0.254: pad.0@9.22,-17.41 pad.0@9.22,-12.99
P83: P5.13 U1.83 | length 8.6
  Top Layer w0.254: U1.83 18.82,-3.75 P5.13
P85: P5.15 U1.85 | length 9.1
  Top Layer w0.254: U1.85 12.08,-2.75 13.39,-1.44 P5.15
P87: P5.17 U1.87 | length 9.7
  Top Layer w0.254: U1.87 12.43,-1.75 15.28,1.1 P5.17
P88: P5.19 U1.88 | length 10.6
  Top Layer w0.254: U1.88 12.28,-1.25 17.17,3.64 P5.19
P90: P5.21 U1.90 | length 11.2
  Top Layer w0.254: U1.90 12.62,-0.25 P5.21
P91: P5.23 U1.91 | length 13.1
  Top Layer w0.254: U1.91 12.478,0.25 17.8,5.572 17.8,7.47 P5.23
P92: P5.25 U1.92 | length 15.1
  Top Layer w0.254: U1.92 12.336,0.75 17.3,5.714 17.3,9.51 P5.25
P93: P5.27 U1.93 | length 17.1
  Top Layer w0.254: U1.93 12.194,1.25 16.8,5.856 16.8,11.55 P5.27
P103: P5.29 U1.103 | length 15.5
  Top Layer w0.254: U1.103 13.709,6.25 16.346,8.887 16.346,13.636 P5.29
P104: P5.31 U1.104 | length 17.4
  Top Layer w0.254: U1.104 13.555,6.75 15.892,9.087 15.892,15.722 P5.31
P105: P5.33 U1.105 | length 19.4
  Top Layer w0.254: U1.105 13.413,7.25 15.438,9.275 15.438,17.808 P5.33
P110: R9.1 U1.110 | length 5.9
  Top Layer w0.254: U1.110 8.25,11.65 9.2,12.6 11,12.6 11.5,13.1 R9.1
P111: P6.2 U1.111 | length 12.6
  Top Layer w0.254: P6.2 7.459,21.42 8.35,20.529 8.35,12.45 7.75,11.85 U1.111
P113: P6.1 U1.113 | length 14.5
  Top Layer w0.254: P6.1 5.11,20.12 7.58,20.12 7.875,19.825 7.875,12.675 6.75,11.55 U1.113
P124: U1.124 X1.3 | length 3.9
  Top Layer w0.254: U1.124 X1.3@1.25,14.4
P125: P4.2 pad.0@-17.146,18.3 U1.125 | length 29.7
  Top Layer w0.254: pad.0@-17.146,18.3 -17.146,16.228 -16.318,15.4 -2.4,15.4 0.75,12.25 U1.125
  Bottom Layer w0.254: P4.2 -20.32,20.15 -17.96,20.15 -17.146,19.336 pad.0@-17.146,18.3
P126: P4.6 U1.126 | length 26.9
  Top Layer w0.254: P4.6 -20.33,17.6 -18,17.6 -17.6,17.2 -17.6,16.04 -16.46,14.9 -2.6,14.9 0.25,12.05 U1.126
P127: P4.5 U1.127 | length 21.8
  Top Layer w0.254: P4.5@-18.898,16.34 -18.548,16.34 -16.608,14.4 -2.8,14.4 -0.25,11.85 U1.127
P129: P4.8 U1.129 | length 23.7
  Top Layer w0.254: P4.8 -20.29,15.1 -17.95,15.1 -16.75,13.9 -3,13.9 -1.25,12.15 U1.129
P130: P4.7 U1.130 | length 19.2
  Top Layer w0.254: P4.7@-18.9,13.4 -3.208,13.4 -1.758,11.95 -1.75,11.95 U1.130
P131: P4.10 U1.131 | length 21.7
  Top Layer w0.254: P4.10 -20.35,12.5 -16.8,12.5 -16.4,12.9 -3.35,12.9 -2.25,11.8 U1.131
P132: P4.9 U1.132 | length 18.2
  Top Layer w0.254: P4.9 -17.382,11.26 -16.242,12.4 -3.5,12.4 -2.75,11.65 U1.132
TCK: P3.2 U1.109 | length 21.5
  Top Layer w0.254: U1.109 8.75,11.45 9.4,12.1 13.2,12.1 14.509,13.409 14.509,22.449 13.358,23.6 11.93,23.6 11.36,24.17 P3.2
TDI: P3.4 pad.0@-14,11 pad.0@-14,16.8 U1.2 | length 39.1
  Top Layer w0.254: pad.0@-14,11 -14,10.3 -11.95,8.25 U1.2 ; pad.0@-14,16.8 -14,17.4 -13.7,17.7 -0.9,17.7 -0.1,18.5 -0.1,22.8 0.6,23.5 5.67,23.5 6.28,24.11 P3.4
  Bottom Layer w0.254: pad.0@-14,11 -15.081,12.081 -15.081,15.719 pad.0@-14,16.8
TDO: P3.1 U1.107 | length 21.2
  Top Layer w0.254: U1.107 13.75,8.25 14.963,9.463 14.963,22.637 13.9,23.7 P3.1
TMS: P3.3 pad.0@-12.7,10.9 pad.0@-12.7,16.8 U1.1 | length 40
  Top Layer w0.254: pad.0@-12.7,10.9 -12.7,9.7 -11.75,8.75 U1.1 ; pad.0@-12.7,16.8 -12.3,17.2 -0.525,17.2 0.5,18.225 0.5,22.458 1.088,23.046 7.816,23.046 8.82,24.05 P3.3
  Bottom Layer w0.254: pad.0@-12.7,10.9 -12.7,10.94 -14.183,12.423 -14.435,12.423 -14.627,12.615 -14.627,15.385 -14.435,15.577 -13.923,15.577 pad.0@-12.7,16.8
V_ARM: P4.3 P7.1 | length 13.6
  Top Layer w0.8: P4.3 -18.596,18.88 -17.116,20.36 -9.64,20.36 -8.535,21.465 P7.1@-8.535,23.465
VREF: D1.2 F1.2 P3.5 R8.2 VR1.1 | length 27.7
  Bottom Layer w0.3: -3.7,24.9 -3,25.6 -2.05,26.55 2.49,26.55 P3.5
  Bottom Layer w0.75: F1.2@-7.8,25.6 -7.7,25.7 -4.34,25.7 -3.62,24.98 -2.94,24.3 VR1.1@-2.94,19.54 ; R8.2 -5.3,18.6 -4.36,19.54 VR1.1@-2.94,19.54 ; VR1.1@-2.94,19.54 VR1.1 -2.9,19.54 VR1.1@-2.94,19.54
pads on no net: P4.4 U1.11 U1.27 U1.28 U1.29 U1.33 U1.35 U1.41 U1.53 U1.62 U1.63 U1.64 U1.67 U1.68 U1.69 U1.70 U1.73 U1.74 U1.75 U1.76 U1.77 U1.78 U1.79 U1.80 U1.82 U1.84 U1.96 U1.97 U1.98 U1.99 U1.101 U1.102 U1.112 U1.114 U1.115 U1.116 U1.117 U1.120 U1.121 U1.123 U1.134 U1.135 U1.138 U1.139 U1.140 U1.141 U1.142 U1.143 X1.1
copper on no net: | length 17.8
  Top Layer w0.05: -25.4,-26 -25.4,-28.1 -23,-28.1 ; -25.4,25 -25.4,27.213 -23,27.213 ; 23,-28.09 25.39,-28.09 25.39,-26.39 ; 23,27.213 25.383,27.213 25.383,25

## Polygon pours and split planes (outlines as drawn)
GND on Top Layer "GND PLANE FPGA" (solid, remove dead copper, pour order 1001): -11.4,11.4 11.4,11.4 11.4,-11.4 -11.4,-11.4
GND on Bottom Layer "Bottom layer" (solid, remove dead copper, pour order 1000): 25.03,-23.91 25.03,26.84 24.931,26.84 -25.03,26.84 -25.03,-23.91

## Other copper
Top Layer:
  region net GND: 9.25,11.42 9.25,9.1 11.4,9.1 11.4,11.42
  rectangle net GND: -6.1,-6.2 6.1,6.1
  region net GND: 11.4,-9.1 9.1,-9.1 9.1,-11.4 11.4,-11.4
  region net GND: -9.1,-11.4 -9.1,-9.1 -11.4,-9.1 -11.4,-11.4
  rectangle net GND: -11.4,9.1 -9.1,11.4
  region net 3.3V: 5.9,15.9 ccw(c6.4,15.9) 6.4,15.4 6.67,15.4 ccw(c6.67,14.72) 5.99,14.72 ccw(c5.61,14.72) 5.61,15.1 5.44,15.1
  region: 5.9,17.3 cw(c6.4,17.3) 6.4,17.8 6.67,17.8 cw(c6.67,18.48) 5.99,18.48 cw(c5.61,18.48) 5.61,18.1 5.44,18.1
  region net GND: 2.5,17.3 ccw(c2,17.3) 2,17.8 1.73,17.8 ccw(c1.73,18.48) 2.41,18.48 ccw(c2.79,18.48) 2.79,18.1 2.96,18.1
  region net P124: 2.5,15.9 cw(c2,15.9) 2,15.4 1.73,15.4 cw(c1.73,14.72) 2.41,14.72 cw(c2.79,14.72) 2.79,15.1 2.96,15.1
Bottom Layer:
  rectangle net GND: 2.5,13 5.7,14.7
  rectangle net GND: 13.1,-3.2 14.7,-0.8
  rectangle net GND: 1.4,-15 3.7,-13.1
  rectangle net GND: -15,0.1 -13.173,3
  rectangle net GND: -16.9,3 -12.512,8.3
  rectangle net GND: 12.5,2.9 14.7,7.1
  rectangle net GND: 12.5,-7.3 14.7,-3.1
  rectangle net GND: -14.7,-6.9 -12.5,-2.7
  rectangle net NetC15_1: -0.1,7.65 2.7,10.5
  rectangle net NetC8_1: -10.5,-1.8 -7.65,0.9
  rectangle net NetC10_1: -2.1,-10.5 0.9,-7.65
  rectangle net NetC13_1: 7.65,-1 10.5,1.8
  rectangle net 1.2V: -7,11.6 -4,12.1
  region net GND: 12.21,10.209 10.089,12.331 8.887,11.128 11.008,9.007
  region net GND: -10.03,12.39 -12.331,10.089 -11.128,8.887 -8.828,11.188
  region net GND: -12.21,-10.209 -10.089,-12.331 -8.887,-11.128 -11.008,-9.007
  region net GND: 10.209,-12.21 12.331,-10.089 11.128,-8.887 9.007,-11.008
  rectangle net GND: -25.03,-25 25.03,-23.71
  rectangle net GND: -11,14.7 -7.3,19
  rectangle net GND: 8.5,17.3 14.7,19.7
  region net 3.3V: -6.95,-11.3 -11.3,-6.975 -11.3,6.975 -6.973,11.302 6.973,11.302 11.3,6.975 11.3,-6.975 6.975,-11.3 -6.95,-11.3 -6.95,-7.65 -7.65,-7.65 -7.65,-2 -10.7,-2 -10.7,1.1 -7.65,1.1 -7.65,7.65 -0.3,7.65 -0.3,10.7 3,10.7 3,7.65 7.65,7.65 7.65,2.2 10.7,2.2 10.7,-1.2 7.65,-1.2 7.65,-7.65 1.1,-7.65 1.1,-10.7 -2.3,-10.7 -2.3,-7.65 -6.95,-7.65
  region net GND: 7.14,7.15 7.14,-7.15 -7.15,-7.15 -7.15,7.15
  pour cut-out: -7.65,7.65 7.65,7.65 7.65,-7.65 -7.65,-7.65

## Silkscreen, mask and mechanical layers (free items; w line width, h text height)
Top Overlay:
  drawing of 18 lines, arcs and shapes, not listed
  text "RST" at -2.9,24.1 h1 r270
  text "TMS" at 8.21,23.52 h1 r270
  text "GND" at 0.7,23.5 h1 r270
  text "TCK" at 10.9,23.5 h1 r270
  text "TDO" at 13.4,23.5 h1 r270
  text "Left" at -22.2,23.4 h1.2
  text "Right" at 18.2,23.4 h1.2
  text "3.3" at 2.41,22.62 h1
  text "TDI" at 5.31,22.62 h1
  text "P125" at -51.93,20.83 h1.52
  text "GND" at -35.73,20.83 h1.52
  text "P105" at 30.07,20.83 h1.52
  text "GND" at 46.27,20.83 h1.52
  text "3.3" at -14.2,20.1 h1 r270
  text "GND" at -12,20.1 h1 r270
  text "V_ARM" at -9.1,20 h1 r270
  text "GND" at -6.4,20 h1 r270
  text "NC" at -51.93,18.312 h1.52
  text "V_ARM" at -35.73,18.312 h1.52
  text "P104" at 30.07,18.312 h1.52
  text "GND" at 46.27,18.312 h1.52
  text "P126" at -51.93,15.795 h1.52
  text "P127" at -35.73,15.795 h1.52
  text "P103" at 30.07,15.795 h1.52
  text "GND" at 46.27,15.795 h1.52
  text "P129" at -51.93,13.277 h1.52
  text "P130" at -35.73,13.277 h1.52
  text "P93" at 30.07,13.277 h1.52
  text "GND" at 46.27,13.277 h1.52
  text "P131" at -51.93,10.76 h1.52
  text "P132" at -35.73,10.76 h1.52
  text "P92" at 30.07,10.76 h1.52
  text "GND" at 46.27,10.76 h1.52
  text "P3" at -51.93,8.242 h1.52
  text "P4" at -35.73,8.242 h1.52
  text "P91" at 30.07,8.242 h1.52
  text "GND" at 46.27,8.242 h1.52
  text "P5" at -51.93,5.725 h1.52
  text "P6" at -35.73,5.725 h1.52
  text "P90" at 30.07,5.725 h1.52
  text "GND" at 46.27,5.725 h1.52
  text "P7" at -51.93,3.207 h1.52
  text "P8" at -35.73,3.207 h1.52
  text "P88" at 30.07,3.207 h1.52
  text "GND" at 46.27,3.207 h1.52
  text "P10" at -51.93,0.69 h1.52
  text "P12" at -35.73,0.69 h1.52
  text "P87" at 30.07,0.69 h1.52
  text "GND" at 46.27,0.69 h1.52
  text "P13" at -51.93,-1.828 h1.52
  text "P15" at -35.73,-1.828 h1.52
  text "P85" at 30.07,-1.828 h1.52
  text "GND" at 46.27,-1.828 h1.52
  text "GND" at -51.93,-4.345 h1.52
  text "P16" at -35.73,-4.345 h1.52
  text "P83" at 30.07,-4.345 h1.52
  text "GND" at 46.27,-4.345 h1.52
  text "GND" at -51.93,-6.863 h1.52
  text "P18" at -35.73,-6.863 h1.52
  text "P60" at 30.07,-6.863 h1.52
  text "GND" at 46.27,-6.863 h1.52
  text "GND" at -51.93,-9.38 h1.52
  text "P19" at -35.73,-9.38 h1.52
  text "P59" at 30.07,-9.38 h1.52
  text "GND" at 46.27,-9.38 h1.52
  text "GND" at -51.93,-11.898 h1.52
  text "P20" at -35.73,-11.898 h1.52
  text "P58" at 30.07,-11.898 h1.52
  text "GND" at 46.27,-11.898 h1.52
  text "GND" at -51.93,-14.415 h1.52
  text "P21" at -35.73,-14.415 h1.52
  text "P57" at 30.07,-14.415 h1.52
  text "GND" at 46.27,-14.415 h1.52
  text "XC3S50AN" at -4.8,-16.1 h1.3
  text "GND" at -51.93,-16.933 h1.52
  text "P24" at -35.73,-16.933 h1.52
  text "P55" at 30.07,-16.933 h1.52
  text "GND" at 46.27,-16.933 h1.52
  text "FPGA Board" at -5.3,-17.3 h1.3
  text "MMMI  07-2008" at -5.2,-19.1 h1
  text "IN 3.3V" at -51.93,-19.45 h1.52
  text "P25" at -35.73,-19.45 h1.52
  text "P54" at 30.07,-19.45 h1.52
  text "GND" at 46.27,-19.45 h1.52
  text "PCB: Caalb" at -4.5,-20.3 h1.3
  text "1" at -13.6,-22.1 h1
  text "2" at -11,-22.1 h1
  text "PWR" at -9,-22.1 h1
  text "IN 3.3V" at -24.946,-30.654 h1.52 r270
  text "P30" at -22.406,-30.654 h1.52 r270
  text "P42" at -19.866,-30.654 h1.52 r270
  text "P43" at -17.326,-30.654 h1.52 r270
  text "P44" at -14.786,-30.654 h1.52 r270
  text "P45" at -12.246,-30.654 h1.52 r270
  text "P55" at -9.706,-30.654 h1.52 r270
  text "P47" at -7.166,-30.654 h1.52 r270
  text "P48" at -4.626,-30.654 h1.52 r270
  text "P49" at -2.086,-30.654 h1.52 r270
  text "P50" at 0.454,-30.654 h1.52 r270
  text "P54" at 2.994,-30.654 h1.52 r270
  text "GND" at 5.534,-30.654 h1.52 r270
  text "IN 3.3V" at 8.074,-30.654 h1.52 r270
  text "P71" at 10.614,-30.654 h1.52 r270
  text "P72" at 13.154,-30.654 h1.52 r270
  text "P57" at 15.684,-30.654 h1.52 r270
  text "P58" at 18.234,-30.654 h1.52 r270
  text "P59" at 20.774,-30.654 h1.52 r270
  text "P60" at 23.314,-30.654 h1.52 r270
Mechanical 1:
  region: -8.75,16.3 -8.75,13.75 -11.3,13.75 -11.3,-3.75 -8.75,-3.75 -8.75,-6.3 8.75,-6.3 8.75,-3.75 11.3,-3.75 11.3,13.75 8.75,13.75 8.75,16.3

## Text inside footprints (layer, text, board x,y; h text height)
P1: Top Overlay "3.3" at -24.7,-21.7 h1 r270; Top Overlay "1" at 24,-23.9 h1; Top Overlay "2" at 21.26,-23.9 h1; Top Overlay "3" at 18.72,-23.9 h1; Top Overlay "4" at 16.18,-23.9 h1; Top Overlay "5" at 13.64,-23.9 h1; Top Overlay "6" at 11.1,-23.9 h1; Top Overlay "3.3" at 7.6,-24 h1; Top Overlay "GND" at 5.8,-21 h1 r270; Top Overlay "9" at 3.48,-23.9 h1; Top Overlay "10" at 0.54,-23.9 h1; Top Overlay "11" at -2,-23.9 h1; Top Overlay "12" at -4.54,-23.9 h1; Top Overlay "13" at -7.08,-23.9 h1; Top Overlay "14" at -9.62,-23.9 h1; Top Overlay "15" at -12.16,-23.9 h1; Top Overlay "16" at -14.7,-23.9 h1; Top Overlay "17" at -17.24,-23.9 h1; Top Overlay "18" at -19.78,-23.9 h1; Top Overlay "19" at -22.32,-23.9 h1
P4: Top Overlay "3.3" at -24.22,-18 h1 r270; Top Overlay "5" at -17.45,15.8 h1; Top Overlay "33" at -17.85,-19.76 h1; Top Overlay "31" at -17.85,-17.22 h1; Top Overlay "29" at -17.85,-14.68 h1; Top Overlay "27" at -17.85,-12.14 h1; Top Overlay "25" at -17.85,-9.6 h1; Top Overlay "23" at -17.85,-7.06 h1; Top Overlay "21" at -17.85,-4.52 h1; Top Overlay "19" at -17.85,-1.98 h1; Top Overlay "17" at -17.85,0.56 h1; Top Overlay "15" at -17.85,3.1 h1; Top Overlay "13" at -17.85,5.64 h1; Top Overlay "11" at -17.85,8.18 h1; Top Overlay "9" at -17.42,10.7 h1; Top Overlay "7" at -17.45,13.26 h1; Top Overlay "2" at -24.02,20.9 h1; Top Overlay "4" at -24.02,18.36 h1; Top Overlay "8" at -24.02,13.28 h1; Top Overlay "10" at -24.42,10.74 h1; Top Overlay "12" at -24.42,8.2 h1; Top Overlay "14" at -24.42,5.66 h1; Top Overlay "16" at -24.42,3.12 h1; Top Overlay "18" at -24.42,0.58 h1; Top Overlay "20" at -24.42,-1.96 h1; Top Overlay "6" at -24.02,15.82 h1; Top Overlay "GND" at -23.15,-11.6 h1 r90
P5: Top Overlay "GND" at 23.12,2.4 h1 r270; Top Overlay "5" at 16.55,-14.6 h1; Top Overlay "33" at 16.15,20.96 h1; Top Overlay "31" at 16.15,18.42 h1; Top Overlay "29" at 16.15,15.88 h1; Top Overlay "27" at 16.15,13.34 h1; Top Overlay "25" at 16.15,10.8 h1; Top Overlay "23" at 16.15,8.26 h1; Top Overlay "21" at 16.15,5.72 h1; Top Overlay "19" at 16.15,3.18 h1; Top Overlay "17" at 16.15,0.64 h1; Top Overlay "15" at 16.15,-1.9 h1; Top Overlay "13" at 16.15,-4.44 h1; Top Overlay "11" at 16.15,-6.98 h1; Top Overlay "9" at 16.52,-9.5 h1; Top Overlay "7" at 16.55,-12.06 h1; Top Overlay "3" at 16.55,-17.14 h1; Top Overlay "1" at 16.72,-19.8 h1